# Altium PCB Monitor_Board.PcbDoc (part 3 of 5)
Units mil, origin at the board's own origin, x right, y up, seen from the top; angles counter-clockwise.
Board outline 3921.03 x 2556.03 mil, 4 copper layers (Top Layer, GND02, PWR03, Bottom Layer), stack 23.756 mil thick; 93 components, 142 nets, 522 pads, 264 vias.
Unrouted connection lines stored in the file: 39.
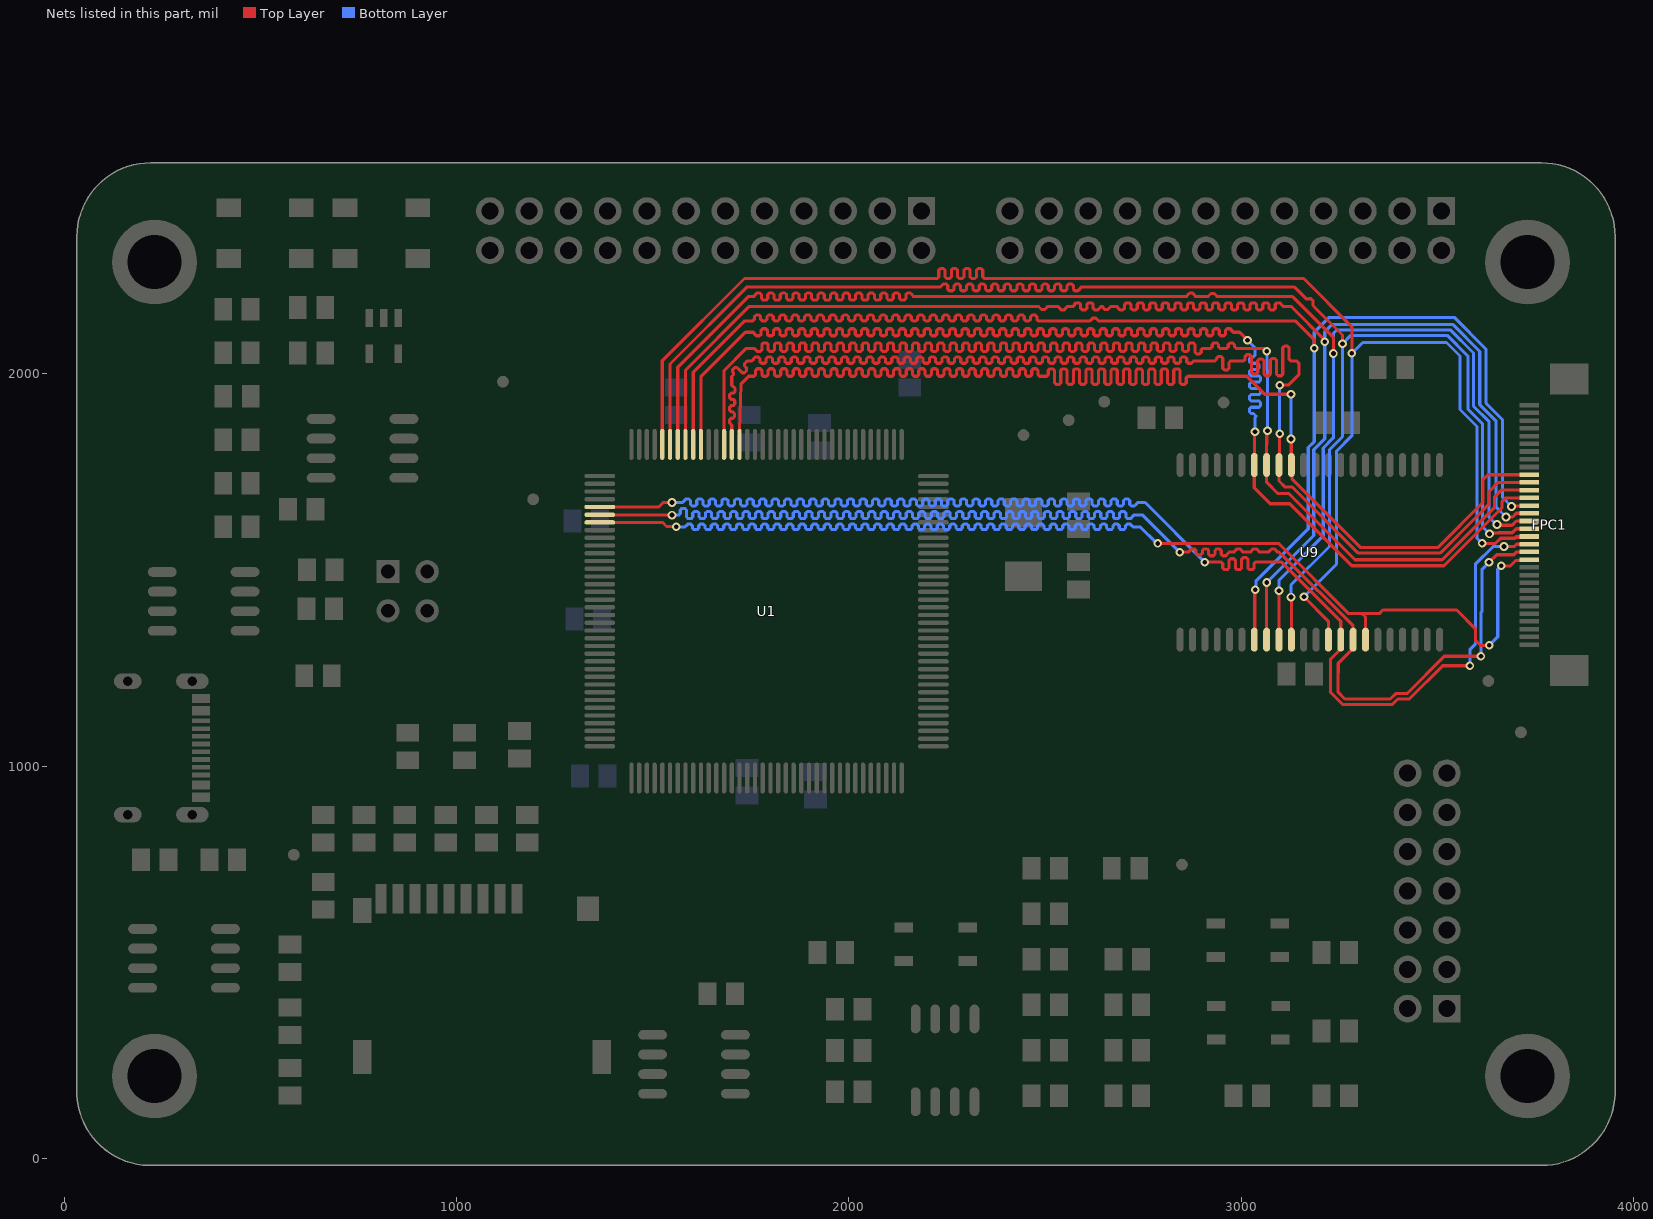
[diagram p4: the nets of this part, all layers, seen from the top]

## Via types
v1: diameter 22, hole 12, Top Layer to Bottom Layer, tented both sides, 259 vias
v2: diameter 45, hole 25, Top Layer to Bottom Layer, tented both sides, 4 vias
v3: diameter 22/22 (per signal layer), hole 12, Top Layer to Bottom Layer, tented both sides, 1 vias

## Nets (pads, with @x,y where several pads share a name; then routed paths per layer and width w, separated by ;. In a path a pad name is that pad's centre, name@x,y a point inside that pad or via, vN(x,y) a via of type N, cw(c..) or ccw(c..) an arc to the next point about the centre after c; other vN are vias at no path point) (continued)
FPC_LCD_D4: FPC1.23 U1.58 U9.13 | length 4008.9
  Top Layer w8: U1.58@1721.1,1820.2 1721.1,1854.88 1724.41,1973.91 1744.5,1994 1754,1994 1758,1994 1762,1998 1762,2009 1766,2013 1774,2013 1778,2009 1778,1998 1782,1994 1790,1994 1794,1998 1794,2009 1798,2013 1806,2013 1810,2009 1810,1998 1814,1994 1822,1994 1826,1998 1826,2009 1830,2013 1838,2013 1842,2009 1842,1998 1846,1994 1854,1994 1858,1998 1858,2009 1862,2013 1870,2013 1874,2009 1874,1998 1878,1994 1886,1994 1890,1998 1890,2009 1894,2013 1902,2013 1906,2009 1906,1998 1910,1994 1918,1994 1922,1998 1922,2009 1926,2013 1934,2013 1938,2009 1938,1998 1942,1994 1950,1994 1954,1998 1954,2009 1958,2013 1966,2013 1970,2009 1970,1998 1974,1994 1982,1994 1986,1998 1986,2009 1990,2013 1998,2013 2002,2009 2002,1998 2006,1994 2014,1994 2018,1998 2018,2009 2022,2013 2030,2013 2034,2009 2034,1998 2038,1994 2046,1994 2050,1998 2050,2009 2054,2013 2062,2013 2066,2009 2066,1998 2070,1994 2078,1994 2082,1998 2082,2009 2086,2013 2094,2013 2098,2009 2098,1998 2102,1994 2110,1994 2114,1998 2114,2009 2118,2013 2126,2013 2130,2009 2130,1998 2134,1994 2142,1994 2146,1998 2146,2009 2150,2013 2158,2013 2162,2009 2162,1998 2166,1994 2174,1994 2178,1998 2178,2009 2182,2013 2190,2013 2194,2009 2194,1998 2198,1994 2206,1994 2210,1998 2210,2009 2214,2013 2222,2013 2226,2009 2226,1998 2230,1994 2238,1994 2242,1998 2242,2009 2246,2013 2254,2013 2258,2009 2258,1998 2262,1994 2270,1994 2274,1998 2274,2009 2278,2013 2286,2013 2290,2009 2290,1998 2294,1994 2302,1994 2306,1998 2306,2009 2310,2013 2318,2013 2322,2009 2322,1998 2326,1994 2334,1994 2338,1998 2338,2009 2342,2013 2350,2013 2354,2009 2354,1998 2358,1994 2366,1994 2370,1998 2370,2009 2374,2013 2382,2013 2386,2009 2386,1998 2390,1994 2398,1994 2402,1998 2402,2009 2406,2013 2414,2013 2418,2009 2418,1998 2422,1994 2430,1994 2434,1998 2434,2009 2438,2013 2446,2013 2450,2009 2450,1998 2454,1994 2462,1994 2466,1998 2466,2009 2470,2013 2478,2013 2482,2009 2482,1998 2486,1994 2492,1994 2500,1994 2504,1994 2508,1998 2508,2008.75 2512,2012.75 2520,2012.75 2524,2008.75 2524,1994 2524,1977.28 2528,1973.28 2536,1973.28 2540,1977.28 2540,1994 2540,2008.75 2544,2012.75 2552,2012.75 2556,2008.75 2556,1994 2556,1977.28 2560,1973.28 2568,1973.28 2572,1977.28 2572,1994 2572,2008.75 2576,2012.75 2584,2012.75 2588,2008.75 2588,1994 2588,1977.28 2592,1973.28 2600,1973.28 2604,1977.28 2604,1994 2604,2008.75 2608,2012.75 2616,2012.75 2620,2008.75 2620,1994 2620,1977.28 2624,1973.28 2632,1973.28 2636,1977.28 2636,1994 2636,2008.75 2640,2012.75 2648,2012.75 2652,2008.75 2652,1994 2652,1977.28 2656,1973.28 2664,1973.28 2668,1977.28 2668,1994 2668,2008.75 2672,2012.75 2680,2012.75 2684,2008.75 2684,1994 2684,1977.28 2688,1973.28 2696,1973.28 2700,1977.28 2700,1994 2700,2008.75 2704,2012.75 2712,2012.75 2716,2008.75 2716,1994 2716,1977.28 2720,1973.28 2728,1973.28 2732,1977.28 2732,1994 2732,2008.75 2736,2012.75 2744,2012.75 2748,2008.75 2748,1994 2748,1977.28 2752,1973.28 2760,1973.28 2764,1977.28 2764,1994 2764,2008.75 2768,2012.75 2776,2012.75 2780,2008.75 2780,1994 2780,1977.28 2784,1973.28 2792,1973.28 2796,1977.28 2796,1994 2796,2008.75 2800,2012.75 2808,2012.75 2812,2008.75 2812,1994 2812,1977.28 2816,1973.28 2824,1973.28 2828,1977.28 2828,1994 2828,2008.75 2832,2012.75 2840,2012.75 2844,2008.75 2844,1994 2844,1977.28 2848,1973.28 2856,1973.28 2860,1977.28 2860,1990 2864,1994 2865,1994 3014,1994 3060,1948 v1(3127,1948) ; v1@3127,1834.7 v1(3127,1834) 3127.38,1833.62 3127.38,1768.04 U9.13@3127.76,1767.66 3129.6,1765.82 3129.6,1731.7 3304.3,1557 3501.1,1557 3616,1671.9 3616,1730 3628.95,1742.95 FPC1.23@3734.31,1742.95
  Bottom Layer w8: v1(3127,1834) v1(3127,1948)
FPC_LCD_D5: FPC1.22 U1.59 U9.14 | length 4015.3
  Top Layer w8: U1.59@1701.42,1820.2 1701.42,1863 1701.42,1869.31 1699.73,1871 1695.73,1875 1695.73,1883 1699.73,1887 1701.42,1887 1704.1,1887 1708.1,1891 1708.1,1899 1704.1,1903 1701.42,1903 1699.73,1903 1695.73,1907 1695.73,1915 1699.73,1919 1701.42,1919 1704.99,1919 1708.99,1923 1708.99,1931 1704.99,1935 1701.42,1935 1699.73,1935 1695.73,1939 1695.73,1947 1699.73,1951 1701.42,1951 1705.88,1951 1709.88,1955 1709.88,1963 1705.88,1967 1705.42,1967 1701.42,1971 1701.42,1983 1701.42,1993.42 1702.5,1994.5 1705.33,1997.33 1705.33,2002.99 1703.38,2004.93 1703.38,2010.59 1709.04,2016.24 1714.7,2016.24 1719.47,2011.47 1727.99,2002.95 1733.65,2002.95 1739.31,2008.6 1739.31,2014.26 1733.61,2019.96 1733.61,2025.61 1741,2033 1749,2033 1753,2033 1757,2037 1757,2039 1761,2043 1769,2043 1773,2039 1773,2033 1773,2031.04 1777,2027.04 1785,2027.04 1789,2031.04 1789,2033 1789,2039 1793,2043 1801,2043 1805,2039 1805,2033 1805,2031.04 1809,2027.04 1817,2027.04 1821,2031.04 1821,2033 1821,2039 1825,2043 1833,2043 1837,2039 1837,2033 1837,2031.04 1841,2027.04 1849,2027.04 1853,2031.04 1853,2033 1853,2039 1857,2043 1865,2043 1869,2039 1869,2033 1869,2031.04 1873,2027.04 1881,2027.04 1885,2031.04 1885,2033 1885,2039 1889,2043 1897,2043 1901,2039 1901,2033 1901,2031.04 1905,2027.04 1913,2027.04 1917,2031.04 1917,2033 1917,2039 1921,2043 1929,2043 1933,2039 1933,2033 1933,2031.04 1937,2027.04 1945,2027.04 1949,2031.04 1949,2033 1949,2039 1953,2043 1961,2043 1965,2039 1965,2033 1965,2031.04 1969,2027.04 1977,2027.04 1981,2031.04 1981,2033 1981,2039 1985,2043 1993,2043 1997,2039 1997,2033 1997,2031.04 2001,2027.04 2009,2027.04 2013,2031.04 2013,2033 2013,2039 2017,2043 2025,2043 2029,2039 2029,2033 2029,2031.04 2033,2027.04 2041,2027.04 2045,2031.04 2045,2033 2045,2039 2049,2043 2057,2043 2061,2039 2061,2033 2061,2031.04 2065,2027.04 2073,2027.04 2077,2031.04 2077,2033 2077,2039 2081,2043 2089,2043 2093,2039 2093,2033 2093,2031.04 2097,2027.04 2105,2027.04 2109,2031.04 2109,2033 2109,2039 2113,2043 2121,2043 2125,2039 2125,2033 2125,2031.04 2129,2027.04 2137,2027.04 2141,2031.04 2141,2033 2141,2039 2145,2043 2153,2043 2157,2039 2157,2033 2157,2031.04 2161,2027.04 2169,2027.04 2173,2031.04 2173,2033 2173,2039 2177,2043 2185,2043 2189,2039 2189,2033 2189,2031.04 2193,2027.04 2201,2027.04 2205,2031.04 2205,2033 2205,2039 2209,2043 2217,2043 2221,2039 2221,2033 2221,2031.04 2225,2027.04 2233,2027.04 2237,2031.04 2237,2033 2237,2039 2241,2043 2249,2043 2253,2039 2253,2033 2253,2031.04 2257,2027.04 2265,2027.04 2269,2031.04 2269,2033 2269,2039 2273,2043 2281,2043 2285,2039 2285,2033 2285,2031.04 2289,2027.04 2297,2027.04 2301,2031.04 2301,2033 2301,2039 2305,2043 2313,2043 2317,2039 2317,2033 2317,2031.04 2321,2027.04 2329,2027.04 2333,2031.04 2333,2033 2333,2039 2337,2043 2345,2043 2349,2039 2349,2033 2349,2031.04 2353,2027.04 2361,2027.04 2365,2031.04 2365,2033 2365,2039 2369,2043 2377,2043 2381,2039 2381,2033 2381,2031.04 2385,2027.04 2393,2027.04 2397,2031.04 2397,2033 2397,2039 2401,2043 2409,2043 2413,2039 2413,2033 2413,2031.04 2417,2027.04 2425,2027.04 2429,2031.04 2429,2033 2429,2039 2433,2043 2441,2043 2445,2039 2445,2033 2445,2031.04 2449,2027.04 2457,2027.04 2461,2031.04 2461,2033 2461,2039 2465,2043 2473,2043 2477,2039 2477,2033 2477,2031.04 2481,2027.04 2489,2027.04 2493,2031.04 2493,2033 2493,2039 2497,2043 2505,2043 2509,2039 2509,2033 2509,2031.04 2513,2027.04 2521,2027.04 2525,2031.04 2525,2033 2525,2039 2529,2043 2537,2043 2541,2039 2541,2033 2541,2031.04 2545,2027.04 2553,2027.04 2557,2031.04 2557,2033 2557,2039 2561,2043 2569,2043 2573,2039 2573,2033 2573,2031.04 2577,2027.04 2585,2027.04 2589,2031.04 2589,2033 2589,2039 2593,2043 2601,2043 2605,2039 2605,2033 2605,2031.04 2609,2027.04 2617,2027.04 2621,2031.04 2621,2033 2621,2039 2625,2043 2633,2043 2637,2039 2637,2033 2637,2031.04 2641,2027.04 2649,2027.04 2653,2031.04 2653,2033 2653,2039 2657,2043 2665,2043 2669,2039 2669,2033 2669,2031.04 2673,2027.04 2681,2027.04 2685,2031.04 2685,2033 2685,2039 2689,2043 2697,2043 2701,2039 2701,2033 2701,2031.04 2705,2027.04 2713,2027.04 2717,2031.04 2717,2033 2717,2039 2721,2043 2729,2043 2733,2039 2733,2033 2733,2031.04 2737,2027.04 2745,2027.04 2749,2031.04 2749,2033 2749,2039 2753,2043 2761,2043 2765,2039 2765,2033 2765,2031.04 2769,2027.04 2777,2027.04 2781,2031.04 2781,2033 2781,2039 2785,2043 2793,2043 2797,2039 2797,2033 2797,2031.04 2801,2027.04 2809,2027.04 2813,2031.04 2813,2033 2813,2039 2817,2043 2825,2043 2829,2039 2829,2033 2829,2031.04 2833,2027.04 2841,2027.04 2845,2031.04 2845,2033 2845,2039 2849,2043 2857,2043 2861,2039 2861,2033 2861,2031.04 2865,2027.04 2873,2027.04 2877,2031.04 2878.96,2033 2883,2033 2891,2033 2907,2033 2913,2033 2921,2033 2933,2033 2937,2037 2937,2040.02 2941,2044.02 2949,2044.02 2953,2040.02 2953,2033 2953,2014.18 2957,2010.18 2965,2010.18 2969,2014.18 2969,2029 2973,2033 2985,2033 2986,2033 2994,2033 3006,2033 3010,2037 3010,2044.82 3014,2048.82 3022,2048.82 3026,2044.82 3026,2033 3026,2003.98 3030,1999.98 3038,1999.98 3042,2003.98 3042,2033 3042,2033.81 3046,2037.81 3054,2037.81 3058,2033.81 3058,2033 3058,1999.18 3062,1995.18 3070,1995.18 3074,1999.18 3074,2033 3074,2034.76 3078,2038.76 3086,2038.76 3090,2034.76 3090,2033 3090,1999.18 3094,1995.18 3102,1995.18 3106,1999.18 3106,2033 3106,2066.82 3110,2070.82 3118,2070.82 3122,2066.82 3122,2037 3126,2033 3141,2033 3147,2027 3147,1998 3121,1972 3099,1972 v1(3098,1971) ; v1(3098,1847) 3097.13,1846.13 3097.13,1768.53 U9.14@3096.26,1767.66 3096.26,1726.74 3111,1712 3129.5,1712 3298.5,1543 3506.89,1543 3599,1635.11 3630,1666.11 ; 3630.89,1667 3632,1668.11 3632,1700 3655.27,1723.26 FPC1.22@3734.31,1723.26
  Bottom Layer w8: v1(3098,1847) 3096,1849 3098,1851 v1(3098,1971)
FPC_LCD_D6: FPC1.21 U1.60 U9.15 | length 4047.6
  Top Layer w8: U1.60@1681.73,1820.2 1681.73,2008.73 1738,2065 1746,2065 1758,2065 1762,2061 1766,2057 1774,2057 1778,2061 1778,2065 1778,2075 1782,2079 1790,2079 1794,2075 1794,2065 1794,2061 1798,2057 1806,2057 1810,2061 1810,2065 1810,2075 1814,2079 1822,2079 1826,2075 1826,2065 1826,2061 1830,2057 1838,2057 1842,2061 1842,2065 1842,2075 1846,2079 1854,2079 1858,2075 1858,2065 1858,2061 1862,2057 1870,2057 1874,2061 1874,2065 1874,2075 1878,2079 1886,2079 1890,2075 1890,2065 1890,2061 1894,2057 1902,2057 1906,2061 1906,2065 1906,2075 1910,2079 1918,2079 1922,2075 1922,2065 1922,2061 1926,2057 1934,2057 1938,2061 1938,2065 1938,2075 1942,2079 1950,2079 1954,2075 1954,2065 1954,2061 1958,2057 1966,2057 1970,2061 1970,2065 1970,2075 1974,2079 1982,2079 1986,2075 1986,2065 1986,2061 1990,2057 1998,2057 2002,2061 2002,2065 2002,2075 2006,2079 2014,2079 2018,2075 2018,2065 2018,2061 2022,2057 2030,2057 2034,2061 2034,2065 2034,2075 2038,2079 2046,2079 2050,2075 2050,2065 2050,2061 2054,2057 2062,2057 2066,2061 2066,2065 2066,2075 2070,2079 2078,2079 2082,2075 2082,2065 2082,2061 2086,2057 2094,2057 2098,2061 2098,2065 2098,2075 2102,2079 2110,2079 2114,2075 2114,2065 2114,2061 2118,2057 2126,2057 2130,2061 2130,2065 2130,2075 2134,2079 2142,2079 2146,2075 2146,2065 2146,2061 2150,2057 2158,2057 2162,2061 2162,2065 2162,2075 2166,2079 2174,2079 2178,2075 2178,2065 2178,2061 2182,2057 2190,2057 2194,2061 2194,2065 2194,2075 2198,2079 2206,2079 2210,2075 2210,2065 2210,2061 2214,2057 2222,2057 2226,2061 2226,2065 2226,2075 2230,2079 2238,2079 2242,2075 2242,2065 2242,2061 2246,2057 2254,2057 2258,2061 2258,2065 2258,2075 2262,2079 2270,2079 2274,2075 2274,2065 2274,2061 2278,2057 2286,2057 2290,2061 2290,2065 2290,2075 2294,2079 2302,2079 2306,2075 2306,2065 2306,2061 2310,2057 2318,2057 2322,2061 2322,2065 2322,2075 2326,2079 2334,2079 2338,2075 2338,2065 2338,2061 2342,2057 2350,2057 2354,2061 2354,2065 2354,2075 2358,2079 2366,2079 2370,2075 2370,2065 2370,2061 2374,2057 2382,2057 2386,2061 2386,2065 2386,2075 2390,2079 2398,2079 2402,2075 2402,2065 2402,2061 2406,2057 2414,2057 2418,2061 2418,2065 2418,2075 2422,2079 2430,2079 2434,2075 2434,2065 2434,2061 2438,2057 2446,2057 2450,2061 2450,2065 2450,2075 2454,2079 2462,2079 2466,2075 2466,2065 2466,2061 2470,2057 2478,2057 2482,2061 2482,2065 2482,2075 2486,2079 2494,2079 2498,2075 2498,2065 2498,2061 2502,2057 2510,2057 2514,2061 2514,2065 2514,2075 2518,2079 2526,2079 2530,2075 2530,2065 2530,2061 2534,2057 2542,2057 2546,2061 2546,2065 2546,2075 2550,2079 2558,2079 2562,2075 2562,2065 2562,2061 2566,2057 2574,2057 2578,2061 2578,2065 2578,2075 2582,2079 2590,2079 2594,2075 2594,2065 2594,2061 2598,2057 2606,2057 2610,2061 2610,2065 2610,2075 2614,2079 2622,2079 2626,2075 2626,2065 2626,2061 2630,2057 2638,2057 2642,2061 2642,2065 2642,2075 2646,2079 2654,2079 2658,2075 2658,2065 2658,2061 2662,2057 2670,2057 2674,2061 2674,2065 2674,2075 2678,2079 2686,2079 2690,2075 2690,2065 2690,2061 2694,2057 2702,2057 2706,2061 2706,2065 2706,2075 2710,2079 2718,2079 2722,2075 2722,2065 2722,2061 2726,2057 2734,2057 2738,2061 2738,2065 2738,2075 2742,2079 2750,2079 2754,2075 2754,2065 2754,2061 2758,2057 2766,2057 2770,2061 2770,2065 2770,2075 2774,2079 2782,2079 2786,2075 2786,2065 2786,2061 2790,2057 2798,2057 2802,2061 2802,2065 2802,2075 2806,2079 2814,2079 2818,2075 2818,2065 2818,2061 2822,2057 2830,2057 2834,2061 2834,2065 2834,2075 2838,2079 2846,2079 2850,2075 2850,2065 2850,2061 2854,2057 2862,2057 2866,2061 2866,2065 2866,2075 2870,2079 2878,2079 2882,2075 2882,2065 2882,2055 2886,2051 2894,2051 2898,2055 2898,2061 2902,2065 2914,2065 2918,2065 2922,2065 2926,2069 2926,2075 2930,2079 2938,2079 2942,2075 2942,2069 2946,2065 2947,2065 2959,2065 2963,2065 2967,2069 2967,2074.31 2971,2078.31 2979,2078.31 2983,2074.31 2983,2069 2987,2065 3002.5,2065 3058,2065 v1(3065.32,2057.68) ; v1@3067,1861 v1(3067,1855) 3065,1853 3065,1820 3064.76,1819.76 U9.15@3064.76,1767.66 3064.76,1723.24 3093,1695 3121,1695 3290,1526 3512,1526 3646,1660 3646,1687 3662.59,1703.59 FPC1.21@3734.31,1703.59
  Bottom Layer w8: v1(3065.32,2057.68) 3065.32,2011.68 3067,2010 v1(3067,1855)
FPC_LCD_D7: FPC1.20 U1.63 U9.16 | length 4075.9
  Top Layer w8: U1.63@1622.68,1820.2 1622.68,1992.68 1736,2106 1744,2106 1756,2106 1760,2102 1760,2101 1764,2097 1772,2097 1776,2101 1776,2106 1776,2111 1780,2115 1788,2115 1792,2111 1792,2106 1792,2101 1796,2097 1804,2097 1808,2101 1808,2106 1808,2111 1812,2115 1820,2115 1824,2111 1824,2106 1824,2101 1828,2097 1836,2097 1840,2101 1840,2106 1840,2111 1844,2115 1852,2115 1856,2111 1856,2106 1856,2101 1860,2097 1868,2097 1872,2101 1872,2106 1872,2111 1876,2115 1884,2115 1888,2111 1888,2106 1888,2101 1892,2097 1900,2097 1904,2101 1904,2106 1904,2111 1908,2115 1916,2115 1920,2111 1920,2106 1920,2101 1924,2097 1932,2097 1936,2101 1936,2106 1936,2111 1940,2115 1948,2115 1952,2111 1952,2106 1952,2101 1956,2097 1964,2097 1968,2101 1968,2106 1968,2111 1972,2115 1980,2115 1984,2111 1984,2106 1984,2101 1988,2097 1996,2097 2000,2101 2000,2106 2000,2111 2004,2115 2012,2115 2016,2111 2016,2106 2016,2101 2020,2097 2028,2097 2032,2101 2032,2106 2032,2111 2036,2115 2044,2115 2048,2111 2048,2106 2048,2101 2052,2097 2060,2097 2064,2101 2064,2106 2064,2111 2068,2115 2076,2115 2080,2111 2080,2106 2080,2101 2084,2097 2092,2097 2096,2101 2096,2106 2096,2111 2100,2115 2108,2115 2112,2111 2112,2106 2112,2101 2116,2097 2124,2097 2128,2101 2128,2106 2128,2111 2132,2115 2140,2115 2144,2111 2144,2106 2144,2101 2148,2097 2156,2097 2160,2101 2160,2106 2160,2111 2164,2115 2172,2115 2176,2111 2176,2106 2176,2101 2180,2097 2188,2097 2192,2101 2192,2106 2192,2111 2196,2115 2204,2115 2208,2111 2208,2106 2208,2101 2212,2097 2220,2097 2224,2101 2224,2106 2224,2111 2228,2115 2236,2115 2240,2111 2240,2106 2240,2101 2244,2097 2252,2097 2256,2101 2256,2106 2256,2111 2260,2115 2268,2115 2272,2111 2272,2106 2272,2101 2276,2097 2284,2097 2288,2101 2288,2106 2288,2111 2292,2115 2300,2115 2304,2111 2304,2106 2304,2101 2308,2097 2316,2097 2320,2101 2320,2106 2320,2111 2324,2115 2332,2115 2336,2111 2336,2106 2336,2101 2340,2097 2348,2097 2352,2101 2352,2106 2352,2111 2356,2115 2364,2115 2368,2111 2368,2106 2368,2101 2372,2097 2380,2097 2384,2101 2384,2106 2384,2111 2388,2115 2396,2115 2400,2111 2400,2106 2400,2101 2404,2097 2412,2097 2416,2101 2416,2106 2416,2111 2420,2115 2428,2115 2432,2111 2432,2106 2432,2101 2436,2097 2444,2097 2448,2101 2448,2106 2448,2111 2452,2115 2460,2115 2464,2111 2464,2106 2464,2101 2468,2097 2476,2097 2480,2101 2480,2106 2480,2111 2484,2115 2492,2115 2496,2111 2496,2106 2496,2101 2500,2097 2508,2097 2512,2101 2512,2106 2512,2111 2516,2115 2524,2115 2528,2111 2528,2106 2528,2101 2532,2097 2540,2097 2544,2101 2544,2106 2544,2111 2548,2115 2556,2115 2560,2111 2560,2106 2560,2101 2564,2097 2572,2097 2576,2101 2576,2106 2576,2111 2580,2115 2588,2115 2592,2111 2592,2106 2592,2101 2596,2097 2604,2097 2608,2101 2608,2106 2608,2111 2612,2115 2620,2115 2624,2111 2624,2106 2624,2101 2628,2097 2636,2097 2640,2101 2640,2106 2640,2111 2644,2115 2652,2115 2656,2111 2656,2106 2656,2101 2660,2097 2668,2097 2672,2101 2672,2106 2672,2111 2676,2115 2684,2115 2688,2111 2688,2106 2688,2101 2692,2097 2700,2097 2704,2101 2704,2106 2704,2111 2708,2115 2716,2115 2720,2111 2720,2106 2720,2101 2724,2097 2732,2097 2736,2101 2736,2106 2736,2111 2740,2115 2748,2115 2752,2111 2752,2106 2752,2101 2756,2097 2764,2097 2768,2101 2768,2106 2768,2111 2772,2115 2780,2115 2784,2111 2784,2106 2784,2101 2788,2097 2796,2097 2800,2101 2800,2106 2800,2111 2804,2115 2812,2115 2816,2111 2816,2106 2816,2101 2820,2097 2828,2097 2832,2101 2832,2106 2832,2111 2836,2115 2844,2115 2848,2111 2848,2106 2848,2101 2852,2097 2860,2097 2864,2101 2864,2106 2864,2111 2868,2115 2876,2115 2880,2111 2880,2106 2880,2101 2884,2097 2892,2097 2896,2101 2896,2106 2896,2111 2900,2115 2908,2115 2912,2111 2912,2106 2912,2101 2916,2097 2924,2097 2928,2101 2928,2106 2928,2111 2932,2115 2940,2115 2944,2111 2944,2106 2944,2101 2948,2097 2956,2097 2960,2101 2960,2106 2960,2111 2964,2115 2972,2115 2976,2111 2976,2110 2980,2106 2992,2106 2996,2106 2997.5,2104.5 v1(3016,2086) ; v1@3034.14,1851.14 3034.14,1768.53 U9.16@3033.27,1767.66 3033.27,1709.73 3074,1669 3124,1669 3282,1511 3516.8,1511 3665,1659.2 3665,1675 3673.9,1683.89 FPC1.20@3734.31,1683.89
  Bottom Layer w8: v1(3016,2086) 3035,2067 3035,2059 3035,2047 3031,2043 3025,2043 3021,2039 3021,2031 3025,2027 3035,2027 3041.22,2027 3045.22,2023 3045.22,2015 3041.22,2011 3035,2011 3025,2011 3021,2007 3021,1999 3025,1995 3035,1995 3045,1995 3049,1991 3049,1983 3045,1979 3035,1979 3025,1979 3021,1975 3021,1967 3025,1963 3035,1963 3045,1963 3049,1959 3049,1951 3045,1947 3035,1947 3025,1947 3021,1943 3021,1935 3025,1931 3035,1931 3045,1931 3049,1927 3049,1919 3045,1915 3035,1915 3025,1915 3021,1911 3021,1903 3025,1899 3031,1899 3035,1895 3038,1892 3035.14,1889.14 v1(3035.14,1852.14)
FPC_LCD_D8: FPC1.19 U1.64 U9.29 | length 4152.1
  Top Layer w8: U1.64@1602.99,1820.2 1602.99,2003.99 1734,2135 1751,2135 1755,2135 1759,2139 1759,2146 1763,2150 1771,2150 1775,2146 1775,2139 1779,2135 1787,2135 1791,2139 1791,2146 1795,2150 1803,2150 1807,2146 1807,2139 1811,2135 1819,2135 1823,2139 1823,2146 1827,2150 1835,2150 1839,2146 1839,2139 1843,2135 1851,2135 1855,2139 1855,2146 1859,2150 1867,2150 1871,2146 1871,2139 1875,2135 1883,2135 1887,2139 1887,2146 1891,2150 1899,2150 1903,2146 1903,2139 1907,2135 1915,2135 1919,2139 1919,2146 1923,2150 1931,2150 1935,2146 1935,2139 1939,2135 1947,2135 1951,2139 1951,2146 1955,2150 1963,2150 1967,2146 1967,2139 1971,2135 1979,2135 1983,2139 1983,2146 1987,2150 1995,2150 1999,2146 1999,2139 2003,2135 2011,2135 2015,2139 2015,2146 2019,2150 2027,2150 2031,2146 2031,2139 2035,2135 2043,2135 2047,2139 2047,2146 2051,2150 2059,2150 2063,2146 2063,2139 2067,2135 2075,2135 2079,2139 2079,2146 2083,2150 2091,2150 2095,2146 2095,2139 2099,2135 2107,2135 2111,2139 2111,2146 2115,2150 2123,2150 2127,2146 2127,2139 2131,2135 2139,2135 2143,2139 2143,2146 2147,2150 2155,2150 2159,2146 2159,2139 2163,2135 2171,2135 2175,2139 2175,2146 2179,2150 2187,2150 2191,2146 2191,2139 2195,2135 2203,2135 2207,2139 2207,2146 2211,2150 2219,2150 2223,2146 2223,2139 2227,2135 2235,2135 2239,2139 2239,2146 2243,2150 2251,2150 2255,2146 2255,2139 2259,2135 2267,2135 2271,2139 2271,2146 2275,2150 2283,2150 2287,2146 2287,2139 2291,2135 2299,2135 2303,2139 2303,2146 2307,2150 2315,2150 2319,2146 2319,2139 2323,2135 2331,2135 2335,2139 2335,2146 2339,2150 2347,2150 2351,2146 2351,2139 2355,2135 2363,2135 2367,2139 2367,2146 2371,2150 2379,2150 2383,2146 2383,2139 2387,2135 2395,2135 2399,2139 2399,2146 2403,2150 2411,2150 2415,2146 2415,2139 2419,2135 2427,2135 2431,2139 2431,2146 2435,2150 2443,2150 2447,2146 2447,2139 2451,2135 2459,2135 2463,2139 2463,2146 2467,2150 2475,2150 2479,2146 2479,2139 2483,2135 2601,2135 2609.54,2135 2614.54,2135 2617.54,2138 2621.54,2142 2629.54,2142 2633.54,2138 2636.55,2135 2643,2135 3138,2135 3186,2087 v1(3186,2065) ; U9.29@3033.27,1322.34 3034.64,1323.7 3034.64,1448.64 v1(3036,1450) ; v1(3689,1662) 3690.11,1663.11 3733.2,1663.11 FPC1.19@3734.31,1664.22
  Bottom Layer w8: v1(3036,1450) 3038,1452 3038,1473 3168,1603 3169,1603 3171,1605 3171,1812.36 3186,1827.36 v1(3186,2065) 3186,2106 3224,2144 3543,2144 3624,2063 3624,1925.37 3666,1883.37 3666,1685 v1(3689,1662)
FPC_LCD_D9: FPC1.18 U1.65 U9.30 | length 4130.3
  Top Layer w8: U1.65@1583.31,1820.2 1583.31,2008.99 1746.32,2172 2468,2172 2483,2172 2487,2168 2491,2164 2499,2164 2503,2168 2507,2172 2511,2172 2533,2172 2537,2168 2537,2167 2541,2163 2549,2163 2553,2167 2553,2168 2557,2172 2561,2172 2572,2172 2574.54,2174.54 2574.54,2177 2578.54,2181 2586.54,2181 2590.54,2177 2590.54,2172 2590.54,2167 2594.54,2163 2602.54,2163 2606.54,2167 2606.54,2172 2606.54,2177 2610.54,2181 2618.54,2181 2622.54,2177 2622.54,2172 2622.54,2167 2626.54,2163 2634.54,2163 2638.54,2167 2638.54,2168 2642.54,2172 2646.54,2172 2648,2170.54 2648,2168 2652,2164 2660,2164 2664,2168 2668,2172 2672,2172 2681,2172 2682.79,2172 2686.79,2168 2686.79,2167 2690.79,2163 2698.79,2163 2702.79,2167 2702.79,2172 2702.79,2177 2706.79,2181 2714.79,2181 2718.79,2177 2718.79,2172 2718.79,2167 2722.79,2163 2730.79,2163 2734.79,2167 2734.79,2172 2734.79,2177 2738.79,2181 2746.79,2181 2750.79,2177 2750.79,2172 2750.79,2167 2754.79,2163 2762.79,2163 2766.79,2167 2766.79,2172 2766.79,2177 2770.79,2181 2778.79,2181 2782.79,2177 2782.79,2172 2782.79,2167 2786.79,2163 2794.79,2163 2798.79,2167 2798.79,2172 2798.79,2177 2802.79,2181 2810.79,2181 2814.79,2177 2814.79,2172 2814.79,2167 2818.79,2163 2826.79,2163 2830.79,2167 2830.79,2172 2830.79,2177 2834.79,2181 2842.79,2181 2846.79,2177 2846.79,2172 2846.79,2167 2850.79,2163 2858.79,2163 2862.79,2167 2862.79,2172 2862.79,2177 2866.79,2181 2874.79,2181 2878.79,2177 2878.79,2172 2878.79,2167 2882.79,2163 2890.79,2163 2894.79,2167 2894.79,2172 2894.79,2177 2898.79,2181 2906.79,2181 2910.79,2177 2910.79,2172 2910.79,2167 2914.79,2163 2922.79,2163 2926.79,2167 2926.79,2172 2926.79,2177 2930.79,2181 2938.79,2181 2942.79,2177 2942.79,2172 2942.79,2167 2946.79,2163 2954.79,2163 2958.79,2167 2958.79,2172 2958.79,2177 2962.79,2181 2970.79,2181 2974.79,2177 2974.79,2172 2974.79,2167 2978.79,2163 2986.79,2163 2990.79,2167 2990.79,2172 2990.79,2177 2994.79,2181 3002.79,2181 3006.79,2177 3006.79,2172 3006.79,2167 3010.79,2163 3018.79,2163 3022.79,2167 3022.79,2172 3022.79,2177 3026.79,2181 3034.79,2181 3038.79,2177 3038.79,2172 3038.79,2167 3042.79,2163 3050.79,2163 3054.79,2167 3054.79,2172 3054.79,2177 3058.79,2181 3066.79,2181 3070.79,2177 3070.79,2172 3070.79,2167 3074.79,2163 3082.79,2163 3086.79,2167 3086.79,2172 3086.79,2177 3090.79,2181 3098.79,2181 3102.79,2177 3102.79,2176 3106.79,2172 3118.79,2172 3126.79,2172 3213,2085.79 v1(3213,2082) ; U9.30@3064.76,1322.34 3064.88,1322.46 3064.88,1467.88 v1(3065,1468) ; v1(3675,1635) 3691.7,1635 3701.22,1644.53 FPC1.18@3734.31,1644.53
  Bottom Layer w8: v1(3065,1468) 3185,1588 3185,1806.56 3213,1834.56 v1(3213,2082) 3213,2107 3232,2126 3539,2126 3608,2057 3608,1921.57 3649,1880.57 3649,1661 v1(3675,1635)
FPC_LCD_D10: FPC1.17 U1.66 U9.31 | length 4145.5
  Top Layer w8: U1.66@1563.62,1820.2 1563.62,2017.14 1743.48,2197 1753,2197 1757,2197 1761,2201 1761,2202 1765,2206 1773,2206 1777,2202 1777,2197 1777,2192 1781,2188 1789,2188 1793,2192 1793,2197 1793,2202 1797,2206 1805,2206 1809,2202 1809,2197 1809,2192 1813,2188 1821,2188 1825,2192 1825,2197 1825,2202 1829,2206 1837,2206 1841,2202 1841,2197 1841,2192 1845,2188 1853,2188 1857,2192 1857,2197 1857,2202 1861,2206 1869,2206 1873,2202 1873,2197 1873,2192 1877,2188 1885,2188 1889,2192 1889,2197 1889,2202 1893,2206 1901,2206 1905,2202 1905,2197 1905,2192 1909,2188 1917,2188 1921,2192 1921,2197 1921,2202 1925,2206 1933,2206 1937,2202 1937,2197 1937,2192 1941,2188 1949,2188 1953,2192 1953,2197 1953,2202 1957,2206 1965,2206 1969,2202 1969,2197 1969,2192 1973,2188 1981,2188 1985,2192 1985,2197 1985,2202 1989,2206 1997,2206 2001,2202 2001,2197 2001,2192 2005,2188 2013,2188 2017,2192 2017,2197 2017,2202 2021,2206 2029,2206 2033,2202 2033,2197 2033,2192 2037,2188 2045,2188 2049,2192 2049,2197 2049,2202 2053,2206 2061,2206 2065,2202 2065,2197 2065,2192 2069,2188 2077,2188 2081,2192 2081,2197 2081,2202 2085,2206 2093,2206 2097,2202 2097,2197 2097,2192 2101,2188 2109,2188 2113,2192 2113,2197 2113,2202 2117,2206 2125,2206 2129,2202 2129,2197 2129,2192 2133,2188 2141,2188 2145,2192 2145,2197 2145,2202 2149,2206 2157,2206 2161,2202 2161,2201 2165,2197 2189,2197 2856,2197 2860,2197 2864,2201 2864,2202 2868,2206 2876,2206 2880,2202 2880,2201 2884,2197 2903,2197 2911,2197 2915,2197 2919,2201 2923,2205 2931,2205 2935,2201 2939,2197 2949,2197 3131,2197 3235,2093 v1(3235,2052) ; U9.31@3096.26,1322.34 v1(3096.26,1447) ; v1(3652,1616) 3652,1614 3690.5,1614 3701.34,1624.84 FPC1.17@3734.31,1624.84
  Bottom Layer w8: v1(3096.26,1447) 3096.26,1474.26 3209.12,1587.12 3209.12,1810.88 3235,1836.76 v1(3235,2052) 3235,2103 3244,2112 3533.2,2112 3592,2053.2 3592,1917.77 3632,1877.77 3632,1634 3650,1616 v1(3652,1616)
FPC_LCD_D11: FPC1.16 U1.67 U9.32 | length 4089.2
  Top Layer w8: U1.67@1543.94,1820.2 1543.94,2025.3 1739.64,2221 2228,2221 2232,2221 2236,2225 2240,2229 2248,2229 2252,2225 2252,2221 2252,2216 2256,2212 2264,2212 2268,2216 2268,2221 2268,2225 2272,2229 2280,2229 2284,2225 2284,2221 2284,2216 2288,2212 2296,2212 2300,2216 2300,2221 2300,2225 2304,2229 2312,2229 2316,2225 2316,2221 2316,2216 2320,2212 2328,2212 2332,2216 2332,2221 2332,2225 2336,2229 2344,2229 2348,2225 2348,2221 2348,2216 2352,2212 2360,2212 2364,2216 2364,2221 2364,2225 2368,2229 2376,2229 2380,2225 2380,2221 2380,2216 2384,2212 2392,2212 2396,2216 2396,2221 2396,2225 2400,2229 2408,2229 2412,2225 2412,2221 2412,2216 2416,2212 2424,2212 2428,2216 2428,2221 2428,2225 2432,2229 2440,2229 2444,2225 2444,2221 2444,2216 2448,2212 2456,2212 2460,2216 2460,2221 2460,2225 2464,2229 2472,2229 2476,2225 2476,2221 2476,2216 2480,2212 2488,2212 2492,2216 2492,2221 2492,2225 2496,2229 2504,2229 2508,2225 2508,2221 2508,2216 2512,2212 2520,2212 2524,2216 2524,2221 2524,2225 2528,2229 2536,2229 2540,2225 2540,2221 2540,2216 2544,2212 2552,2212 2556,2216 2556,2221 2556,2225 2560,2229 2568,2229 2572,2225 2572,2221 2572,2216 2576,2212 2584,2212 2588,2216 2588,2217 2592,2221 2607,2221 3136,2221 3163,2194 3165.83,2191.17 3171.49,2191.17 3171.86,2191.54 3177.51,2191.54 3183.17,2185.89 3183.17,2180.23 3182.8,2179.86 3182.8,2174.2 3189,2168 3258,2099 v1(3258,2077) ; v1(3127,1431) 3127.88,1430.12 3127.88,1322.46 U9.32@3127.76,1322.34 ; v1(3633,1592) 3635.68,1594.68 3655.18,1594.68 3655.5,1595 3691.3,1595 3701.45,1605.16 FPC1.16@3734.31,1605.16
  Bottom Layer w8: v1(3127,1431) 3127,1462 3225,1560 3225,1806.96 3258,1839.96 v1(3258,2077) 3279,2098 3525,2098 3578,2045 3578,1910 3615.01,1872.99 3615.01,1609.99 v1(3633,1592)
FPC_LCD_D12: FPC1.15 U1.68 U9.35 | length 4101.9
  Top Layer w8: U1.68@1524.25,1820.2 1524.25,2033.45 1733.8,2243 2221,2243 2225,2243 2229,2247 2229,2264.27 2233,2268.27 2241,2268.27 2245,2264.27 2245,2247 2249,2243 2257,2243 2261,2247 2261,2264.27 2265,2268.27 2273,2268.27 2277,2264.27 2277,2247 2281,2243 2289,2243 2293,2247 2293,2264.27 2297,2268.27 2305,2268.27 2309,2264.27 2309,2247 2313,2243 2321,2243 2325,2247 2325,2264.27 2329,2268.27 2337,2268.27 2341,2264.27 2341,2247 2345,2243 2347,2243 3159,2243 3282,2120 v1(3282,2052.47) ; v1(3160,1432) 3222.24,1369.76 U9.35@3222.24,1322.34 ; v1@3281.47,2049 v1@3282,2049.53 ; v1(3614,1568) 3648.3,1568 3661.3,1581 3697.1,1581 3699.66,1583.57 3716.03,1583.57 FPC1.15@3717.94,1585.47 ; 3701.2,1585.1 3701.57,1585.47 FPC1.15@3717.94,1585.47 ; FPC1.15@3734.31,1585.47 FPC1.15@3717.94,1585.47 ; v1@3282,2049.53 3283.47,2051 v1(3282,2052.47) ; v1@3282,2049.53 v1(3282,2052.47)
  Bottom Layer w8: v1(3160,1432) 3243,1515 3243,1803 3282,1842 v1(3282,2052.47) 3282.47,2052.47 3310,2080 3523.2,2080 3557.55,2045.65 3557.55,1909.19 3601.01,1865.74 3601.01,1580.99 v1(3614,1568)
FPC_LCD_D13: FPC1.14 U1.77 U9.36 | length 4124.4
  Top Layer w8: U1.77@1364.8,1660.75 1515,1660.75 1526,1671.75 1548.75,1671.75 v1(1549,1672) ; v1(2907,1520) 2929,1520 2937,1520 2949,1520 2953,1516 2953,1505 2957,1501 2965,1501 2969,1505 2969,1520 2969,1524.7 2973,1528.7 2981,1528.7 2985,1524.7 2985,1520 2985,1505 2989,1501 2997,1501 3001,1505 3001,1520 3001,1527.5 3005,1531.5 3013,1531.5 3017,1527.5 3017,1520 3017,1505 3021,1501 3029,1501 3033,1505 3033,1517 3036,1520 3103,1520 3253.74,1369.26 U9.36@3253.74,1322.34 3253.74,1298.74 3227.5,1272.5 3227.5,1188 3258.5,1157 3385.3,1157 3399.3,1171 3428.3,1171 3513.3,1256 v1(3583,1256) ; v1(3670,1560) 3696,1560 3701.78,1565.78 FPC1.14@3734.31,1565.78
  Bottom Layer w8: v1(1549,1672) 1572,1672 1576,1672 1580,1676 1580,1677 1584,1681 1592,1681 1596,1677 1596,1672 1596,1667 1600,1663 1608,1663 1612,1667 1612,1672 1612,1677 1616,1681 1624,1681 1628,1677 1628,1672 1628,1667 1632,1663 1640,1663 1644,1667 1644,1672 1644,1677 1648,1681 1656,1681 1660,1677 1660,1672 1660,1667 1664,1663 1672,1663 1676,1667 1676,1672 1676,1677 1680,1681 1688,1681 1692,1677 1692,1672 1692,1667 1696,1663 1704,1663 1708,1667 1708,1672 1708,1677 1712,1681 1720,1681 1724,1677 1724,1672 1724,1667 1728,1663 1736,1663 1740,1667 1740,1672 1740,1677 1744,1681 1752,1681 1756,1677 1756,1672 1756,1667 1760,1663 1768,1663 1772,1667 1772,1672 1772,1677 1776,1681 1784,1681 1788,1677 1788,1672 1788,1667 1792,1663 1800,1663 1804,1667 1804,1672 1804,1677 1808,1681 1816,1681 1820,1677 1820,1672 1820,1667 1824,1663 1832,1663 1836,1667 1836,1672 1836,1677 1840,1681 1848,1681 1852,1677 1852,1672 1852,1667 1856,1663 1864,1663 1868,1667 1868,1672 1868,1677 1872,1681 1880,1681 1884,1677 1884,1672 1884,1667 1888,1663 1896,1663 1900,1667 1900,1672 1900,1677 1904,1681 1912,1681 1916,1677 1916,1672 1916,1667 1920,1663 1928,1663 1932,1667 1932,1672 1932,1677 1936,1681 1944,1681 1948,1677 1948,1672 1948,1667 1952,1663 1960,1663 1964,1667 1964,1672 1964,1677 1968,1681 1976,1681 1980,1677 1980,1672 1980,1667 1984,1663 1992,1663 1996,1667 1996,1672 1996,1677 2000,1681 2008,1681 2012,1677 2012,1672 2012,1667 2016,1663 2024,1663 2028,1667 2028,1672 2028,1677 2032,1681 2040,1681 2044,1677 2044,1672 2044,1667 2048,1663 2056,1663 2060,1667 2060,1672 2060,1677 2064,1681 2072,1681 2076,1677 2076,1672 2076,1667 2080,1663 2088,1663 2092,1667 2092,1672 2092,1677 2096,1681 2104,1681 2108,1677 2108,1672 2108,1667 2112,1663 2120,1663 2124,1667 2124,1672 2124,1677 2128,1681 2136,1681 2140,1677 2140,1672 2140,1667 2144,1663 2152,1663 2156,1667 2156,1672 2156,1677 2160,1681 2168,1681 2172,1677 2172,1672 2172,1667 2176,1663 2184,1663 2188,1667 2188,1672 2188,1677 2192,1681 2200,1681 2204,1677 2204,1672 2204,1667 2208,1663 2216,1663 2220,1667 2220,1672 2220,1677 2224,1681 2232,1681 2236,1677 2236,1672 2236,1667 2240,1663 2248,1663 2252,1667 2252,1672 2252,1677 2256,1681 2264,1681 2268,1677 2268,1672 2268,1667 2272,1663 2280,1663 2284,1667 2284,1672 2284,1677 2288,1681 2296,1681 2300,1677 2300,1672 2300,1667 2304,1663 2312,1663 2316,1667 2316,1672 2316,1677 2320,1681 2328,1681 2332,1677 2332,1672 2332,1667 2336,1663 2344,1663 2348,1667 2348,1672 2348,1677 2352,1681 2360,1681 2364,1677 2364,1672 2364,1667 2368,1663 2376,1663 2380,1667 2380,1672 2380,1677 2384,1681 2392,1681 2396,1677 2396,1672 2396,1667 2400,1663 2408,1663 2412,1667 2412,1672 2412,1677 2416,1681 2424,1681 2428,1677 2428,1672 2428,1667 2432,1663 2440,1663 2444,1667 2444,1672 2444,1677 2448,1681 2456,1681 2460,1677 2460,1672 2460,1667 2464,1663 2472,1663 2476,1667 2476,1672 2476,1677 2480,1681 2488,1681 2492,1677 2492,1672 2492,1667 2496,1663 2504,1663 2508,1667 2508,1672 2508,1677 2512,1681 2520,1681 2524,1677 2524,1672 2524,1667 2528,1663 2536,1663 2540,1667 2540,1672 2540,1677 2544,1681 2552,1681 2556,1677 2556,1672 2556,1667 2560,1663 2568,1663 2572,1667 2572,1672 2572,1677 2576,1681 2584,1681 2588,1677 2588,1672 2588,1667 2592,1663 2600,1663 2604,1667 2604,1672 2604,1677 2608,1681 2616,1681 2620,1677 2620,1672 2620,1667 2624,1663 2632,1663 2636,1667 2636,1672 2636,1677 2640,1681 2648,1681 2652,1677 2652,1672 2652,1667 2656,1663 2664,1663 2668,1667 2668,1672 2668,1677 2672,1681 2680,1681 2684,1677 2684,1672 2684,1667 2688,1663 2696,1663 2700,1667 2700,1672 2700,1677 2704,1681 2712,1681 2716,1677 2716,1672 2716,1667 2720,1663 2728,1663 2732,1667 2732,1668 2736,1672 2748,1672 2752.6,1672 2755,1672 v1(2907,1520) ; v1(3583,1256) 3583,1297 3597,1311 3597,1515 3642,1560 v1(3670,1560)
FPC_LCD_D14: FPC1.13 U1.78 U9.37 | length 4060.7
  Top Layer w8: U1.78@1364.8,1641.06 1365.86,1640 v1(1549,1640) ; v1(2843.5,1545.5) 2861,1545.5 2865,1545.5 2869,1549.5 2869,1549.75 2873,1553.75 2881,1553.75 2885,1549.75 2885,1545.5 2885,1542.46 2889,1538.46 2897,1538.46 2901,1542.46 2901,1545.5 2901,1549.75 2905,1553.75 2913,1553.75 2917,1549.75 2917,1545.5 2917,1540.5 2921,1536.5 2929,1536.5 2933,1540.5 2933,1545.5 2933,1549.75 2937,1553.75 2945,1553.75 2949,1549.75 2949,1545.5 2949,1540.5 2953,1536.5 2961,1536.5 2965,1540.5 2965,1541.5 2969,1545.5 2977,1545.5 2981,1545.5 2985,1549.5 2985,1549.75 2989,1553.75 2997,1553.75 3001,1549.75 3001,1549.5 3005,1545.5 3019,1545.5 3023,1545.5 3027,1549.5 3027,1549.75 3031,1553.75 3039,1553.75 3043,1549.75 3043,1549.5 3047,1545.5 3052,1545.5 3065,1545.5 3069,1545.5 3073,1549.5 3077,1553.5 3085,1553.5 3089,1549.5 3093,1545.5 3096.26,1545.5 3108.8,1534 3285.24,1357.56 U9.37@3285.24,1322.34 3285.24,1300.63 3267.74,1283.13 3247.31,1262.69 3247.31,1237.15 3247,1236.84 3247,1188.3 3264.3,1171 3379.5,1171 3393.5,1185 3422.5,1185 3517.5,1280 v1(3611,1280) ; v1(3631.5,1519.5) 3651,1539 3694.8,1539 3701.9,1546.11 FPC1.13@3734.31,1546.11
  Bottom Layer w8: v1(1549,1640) 1562,1640 1566,1640 1570,1644 1570,1653 1574,1657 1582,1657 1586,1653 1586,1640 1586,1635 1590,1631 1598,1631 1602,1635 1602,1640 1602,1645 1606,1649 1614,1649 1618,1645 1618,1640 1618,1635 1622,1631 1630,1631 1634,1635 1634,1640 1634,1645 1638,1649 1646,1649 1650,1645 1650,1640 1650,1635 1654,1631 1662,1631 1666,1635 1666,1640 1666,1645 1670,1649 1678,1649 1682,1645 1682,1640 1682,1635 1686,1631 1694,1631 1698,1635 1698,1640 1698,1645 1702,1649 1710,1649 1714,1645 1714,1640 1714,1635 1718,1631 1726,1631 1730,1635 1730,1640 1730,1645 1734,1649 1742,1649 1746,1645 1746,1640 1746,1635 1750,1631 1758,1631 1762,1635 1762,1640 1762,1645 1766,1649 1774,1649 1778,1645 1778,1640 1778,1635 1782,1631 1790,1631 1794,1635 1794,1640 1794,1645 1798,1649 1806,1649 1810,1645 1810,1640 1810,1635 1814,1631 1822,1631 1826,1635 1826,1640 1826,1645 1830,1649 1838,1649 1842,1645 1842,1640 1842,1635 1846,1631 1854,1631 1858,1635 1858,1640 1858,1645 1862,1649 1870,1649 1874,1645 1874,1640 1874,1635 1878,1631 1886,1631 1890,1635 1890,1640 1890,1645 1894,1649 1902,1649 1906,1645 1906,1640 1906,1635 1910,1631 1918,1631 1922,1635 1922,1640 1922,1645 1926,1649 1934,1649 1938,1645 1938,1640 1938,1635 1942,1631 1950,1631 1954,1635 1954,1640 1954,1645 1958,1649 1966,1649 1970,1645 1970,1640 1970,1635 1974,1631 1982,1631 1986,1635 1986,1640 1986,1645 1990,1649 1998,1649 2002,1645 2002,1640 2002,1635 2006,1631 2014,1631 2018,1635 2018,1640 2018,1645 2022,1649 2030,1649 2034,1645 2034,1640 2034,1635 2038,1631 2046,1631 2050,1635 2050,1640 2050,1645 2054,1649 2062,1649 2066,1645 2066,1640 2066,1635 2070,1631 2078,1631 2082,1635 2082,1640 2082,1645 2086,1649 2094,1649 2098,1645 2098,1640 2098,1635 2102,1631 2110,1631 2114,1635 2114,1640 2114,1645 2118,1649 2126,1649 2130,1645 2130,1640 2130,1635 2134,1631 2142,1631 2146,1635 2146,1640 2146,1645 2150,1649 2158,1649 2162,1645 2162,1640 2162,1635 2166,1631 2174,1631 2178,1635 2178,1640 2178,1645 2182,1649 2190,1649 2194,1645 2194,1640 2194,1635 2198,1631 2206,1631 2210,1635 2210,1640 2210,1645 2214,1649 2222,1649 2226,1645 2226,1640 2226,1635 2230,1631 2238,1631 2242,1635 2242,1640 2242,1645 2246,1649 2254,1649 2258,1645 2258,1640 2258,1635 2262,1631 2270,1631 2274,1635 2274,1640 2274,1645 2278,1649 2286,1649 2290,1645 2290,1640 2290,1635 2294,1631 2302,1631 2306,1635 2306,1640 2306,1645 2310,1649 2318,1649 2322,1645 2322,1640 2322,1635 2326,1631 2334,1631 2338,1635 2338,1640 2338,1645 2342,1649 2350,1649 2354,1645 2354,1640 2354,1635 2358,1631 2366,1631 2370,1635 2370,1640 2370,1645 2374,1649 2382,1649 2386,1645 2386,1640 2386,1635 2390,1631 2398,1631 2402,1635 2402,1640 2402,1645 2406,1649 2414,1649 2418,1645 2418,1640 2418,1635 2422,1631 2430,1631 2434,1635 2434,1640 2434,1645 2438,1649 2446,1649 2450,1645 2450,1640 2450,1635 2454,1631 2462,1631 2466,1635 2466,1640 2466,1645 2470,1649 2478,1649 2482,1645 2482,1640 2482,1635 2486,1631 2494,1631 2498,1635 2498,1640 2498,1645 2502,1649 2510,1649 2514,1645 2514,1640 2514,1635 2518,1631 2526,1631 2530,1635 2530,1640 2530,1645 2534,1649 2542,1649 2546,1645 2546,1640 2546,1635 2550,1631 2558,1631 2562,1635 2562,1640 2562,1645 2566,1649 2574,1649 2578,1645 2578,1640 2578,1635 2582,1631 2590,1631 2594,1635 2594,1640 2594,1645 2598,1649 2606,1649 2610,1645 2610,1640 2610,1635 2614,1631 2622,1631 2626,1635 2626,1640 2626,1645 2630,1649 2638,1649 2642,1645 2642,1640 2642,1635 2646,1631 2654,1631 2658,1635 2658,1640 2658,1645 2662,1649 2670,1649 2674,1645 2674,1640 2674,1635 2678,1631 2686,1631 2690,1635 2690,1640 2690,1645 2694,1649 2702,1649 2706,1645 2706,1640 2706,1635 2710,1631 2718,1631 2722,1635 2722,1636 2726,1640 2738,1640 2745,1640 2749,1640 v1(2843.5,1545.5) v1@2845.5,1545.5 ; v1(3611,1280) 3611,1392 3614,1395 3614,1502 v1(3631.5,1519.5)
FPC_LCD_D15: FPC1.12 U1.79 U9.38 | length 3464.7
  Top Layer w8: U1.79@1364.8,1621.38 1524.62,1621.38 1535,1611 1559,1611 v1(1560,1610) ; v1(2787.25,1567.75) 3094.85,1567.75 3273.7,1388.9 3308.1,1388.9 ; U9.38@3316.73,1300.63 U9.38@3316.73,1322.34 3316.73,1380.27 3308.1,1388.9 ; v1(3632,1308) 3610,1308 3597,1321 3597,1350 3549,1398 3360.95,1398 3351.85,1388.9 3308.1,1388.9 ; v1(3662.5,1510.5) 3686.5,1510.5 3700.51,1524.51 3732.4,1524.51 FPC1.12@3734.31,1526.41
  Bottom Layer w8: v1(1560,1610) 1577,1610 1582,1610 1585,1613 1589,1617 1597,1617 1601,1613 1601,1610 1601,1607 1605,1603 1613,1603 1617,1607 1617,1610 1617,1613 1621,1617 1629,1617 1633,1613 1633,1610 1633,1607 1637,1603 1645,1603 1649,1607 1649,1610 1649,1613 1653,1617 1661,1617 1665,1613 1665,1610 1665,1607 1669,1603 1677,1603 1681,1607 1681,1610 1681,1613 1685,1617 1693,1617 1697,1613 1697,1610 1697,1607 1701,1603 1709,1603 1713,1607 1713,1610 1713,1613 1717,1617 1725,1617 1729,1613 1729,1610 1729,1607 1733,1603 1741,1603 1745,1607 1745,1610 1745,1613 1749,1617 1757,1617 1761,1613 1761,1610 1761,1607 1765,1603 1773,1603 1777,1607 1777,1610 1777,1613 1781,1617 1789,1617 1793,1613 1793,1610 1793,1607 1797,1603 1805,1603 1809,1607 1809,1610 1809,1613 1813,1617 1821,1617 1825,1613 1825,1610 1825,1607 1829,1603 1837,1603 1841,1607 1841,1610 1841,1613 1845,1617 1853,1617 1857,1613 1857,1610 1857,1607 1861,1603 1869,1603 1873,1607 1873,1610 1873,1613 1877,1617 1885,1617 1889,1613 1889,1610 1889,1607 1893,1603 1901,1603 1905,1607 1905,1610 1905,1613 1909,1617 1917,1617 1921,1613 1921,1610 1921,1607 1925,1603 1933,1603 1937,1607 1937,1610 1937,1613 1941,1617 1949,1617 1953,1613 1953,1610 1953,1607 1957,1603 1965,1603 1969,1607 1969,1610 1969,1613 1973,1617 1981,1617 1985,1613 1985,1610 1985,1607 1989,1603 1997,1603 2001,1607 2001,1610 2001,1613 2005,1617 2013,1617 2017,1613 2017,1610 2017,1607 2021,1603 2029,1603 2033,1607 2033,1610 2033,1613 2037,1617 2045,1617 2049,1613 2049,1610 2049,1607 2053,1603 2061,1603 2065,1607 2065,1610 2065,1613 2069,1617 2077,1617 2081,1613 2081,1610 2081,1607 2085,1603 2093,1603 2097,1607 2097,1610 2097,1613 2101,1617 2109,1617 2113,1613 2113,1610 2113,1607 2117,1603 2125,1603 2129,1607 2129,1610 2129,1613 2133,1617 2141,1617 2145,1613 2145,1610 2145,1607 2149,1603 2157,1603 2161,1607 2161,1610 2161,1613 2165,1617 2173,1617 2177,1613 2177,1610 2177,1607 2181,1603 2189,1603 2193,1607 2193,1610 2193,1613 2197,1617 2205,1617 2209,1613 2209,1610 2209,1607 2213,1603 2221,1603 2225,1607 2225,1610 2225,1613 2229,1617 2237,1617 2241,1613 2241,1610 2241,1607 2245,1603 2253,1603 2257,1607 2257,1610 2257,1613 2261,1617 2269,1617 2273,1613 2273,1610 2273,1607 2277,1603 2285,1603 2289,1607 2289,1610 2289,1613 2293,1617 2301,1617 2305,1613 2305,1610 2305,1607 2309,1603 2317,1603 2321,1607 2321,1610 2321,1613 2325,1617 2333,1617 2337,1613 2337,1610 2337,1607 2341,1603 2349,1603 2353,1607 2353,1610 2353,1613 2357,1617 2365,1617 2369,1613 2369,1610 2369,1607 2373,1603 2381,1603 2385,1607 2385,1610 2385,1613 2389,1617 2397,1617 2401,1613 2401,1610 2401,1607 2405,1603 2413,1603 2417,1607 2417,1610 2417,1613 2421,1617 2429,1617 2433,1613 2433,1610 2433,1607 2437,1603 2445,1603 2449,1607 2449,1610 2449,1613 2453,1617 2461,1617 2465,1613 2465,1610 2465,1607 2469,1603 2477,1603 2481,1607 2481,1610 2481,1613 2485,1617 2493,1617 2497,1613 2497,1610 2497,1607 2501,1603 2509,1603 2513,1607 2513,1610 2513,1613 2517,1617 2525,1617 2529,1613 2529,1610 2529,1607 2533,1603 2541,1603 2545,1607 2545,1610 2545,1613 2549,1617 2557,1617 2561,1613 2561,1610 2561,1607 2565,1603 2573,1603 2577,1607 2577,1610 2577,1613 2581,1617 2589,1617 2593,1613 2593,1610 2593,1607 2597,1603 2605,1603 2609,1607 2609,1610 2609,1613 2613,1617 2621,1617 2625,1613 2625,1610 2625,1607 2629,1603 2637,1603 2641,1607 2641,1610 2641,1613 2645,1617 2653,1617 2657,1613 2657,1610 2657,1607 2661,1603 2669,1603 2673,1607 2673,1610 2673,1613 2677,1617 2685,1617 2689,1613 2689,1610 2689,1607 2693,1603 2701,1603 2705,1607 2705,1610 2705,1613 2709,1617 2717,1617 2721,1613 2724,1610 2737,1610 2742,1610 2784.25,1567.75 v1(2787.25,1567.75) ; v1(3632,1308) 3654,1330 3654,1502 v1(3662.5,1510.5)